# Altium PCB Box.PcbDoc
Units mil, origin at the board's own origin, x right, y up, seen from the top; angles counter-clockwise.
Board outline 12070 x 6465 mil, 2 copper layers (Top Layer, Bottom Layer); 1 components, 0 nets, 28 pads, 0 vias.
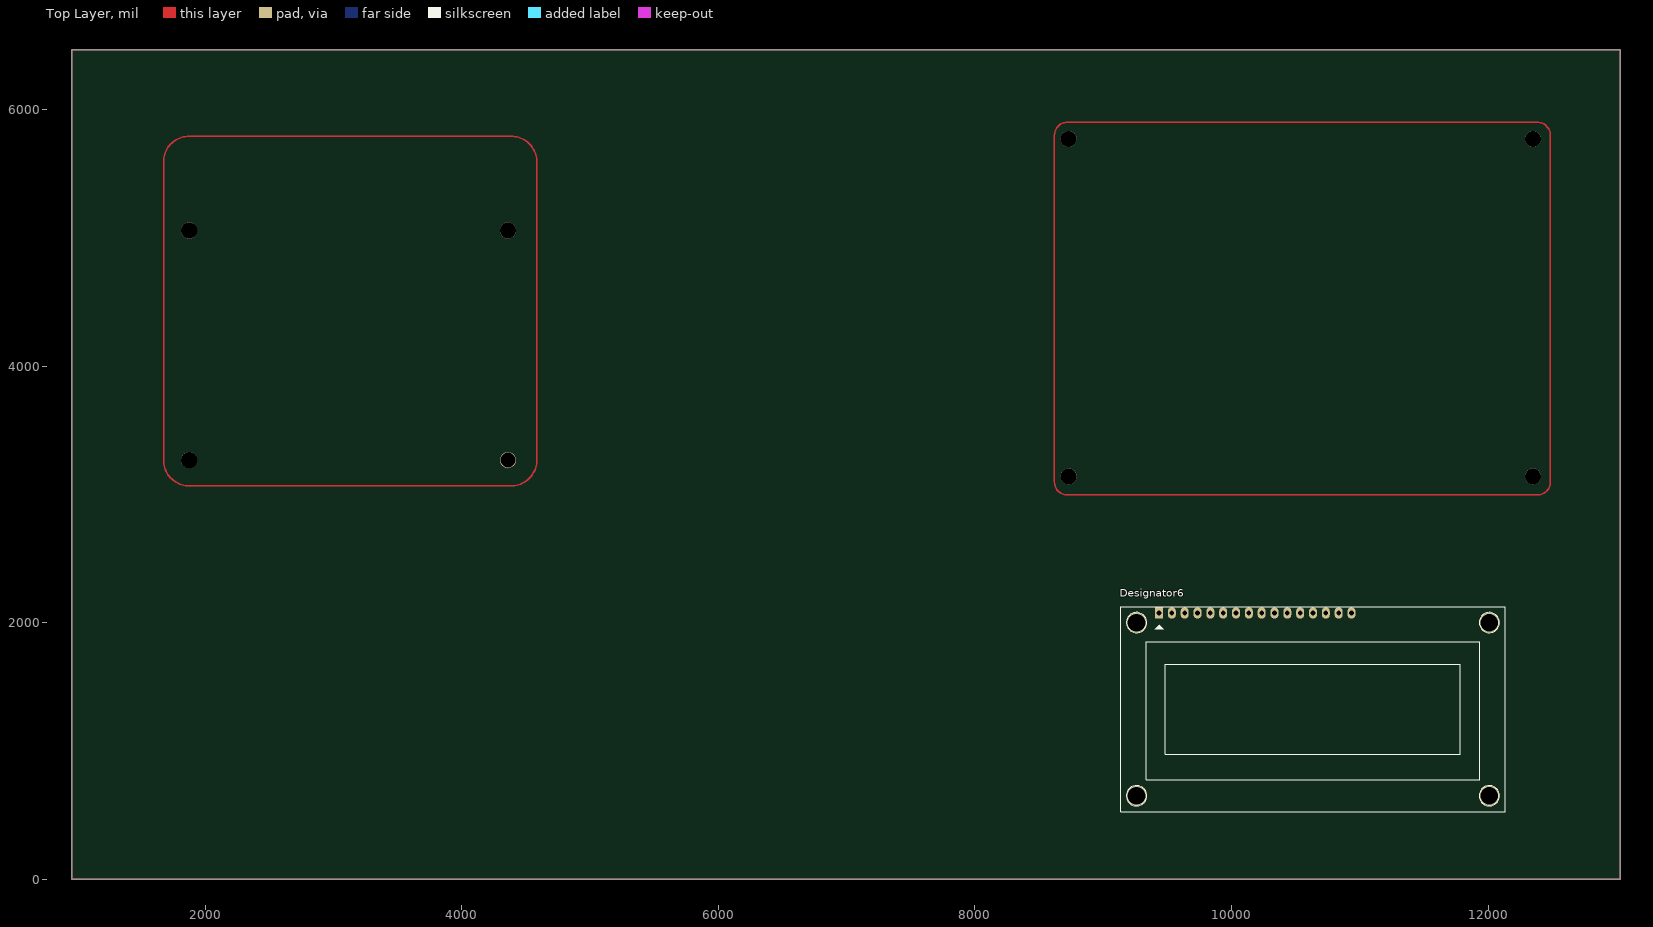
[diagram p0: Top Layer view]
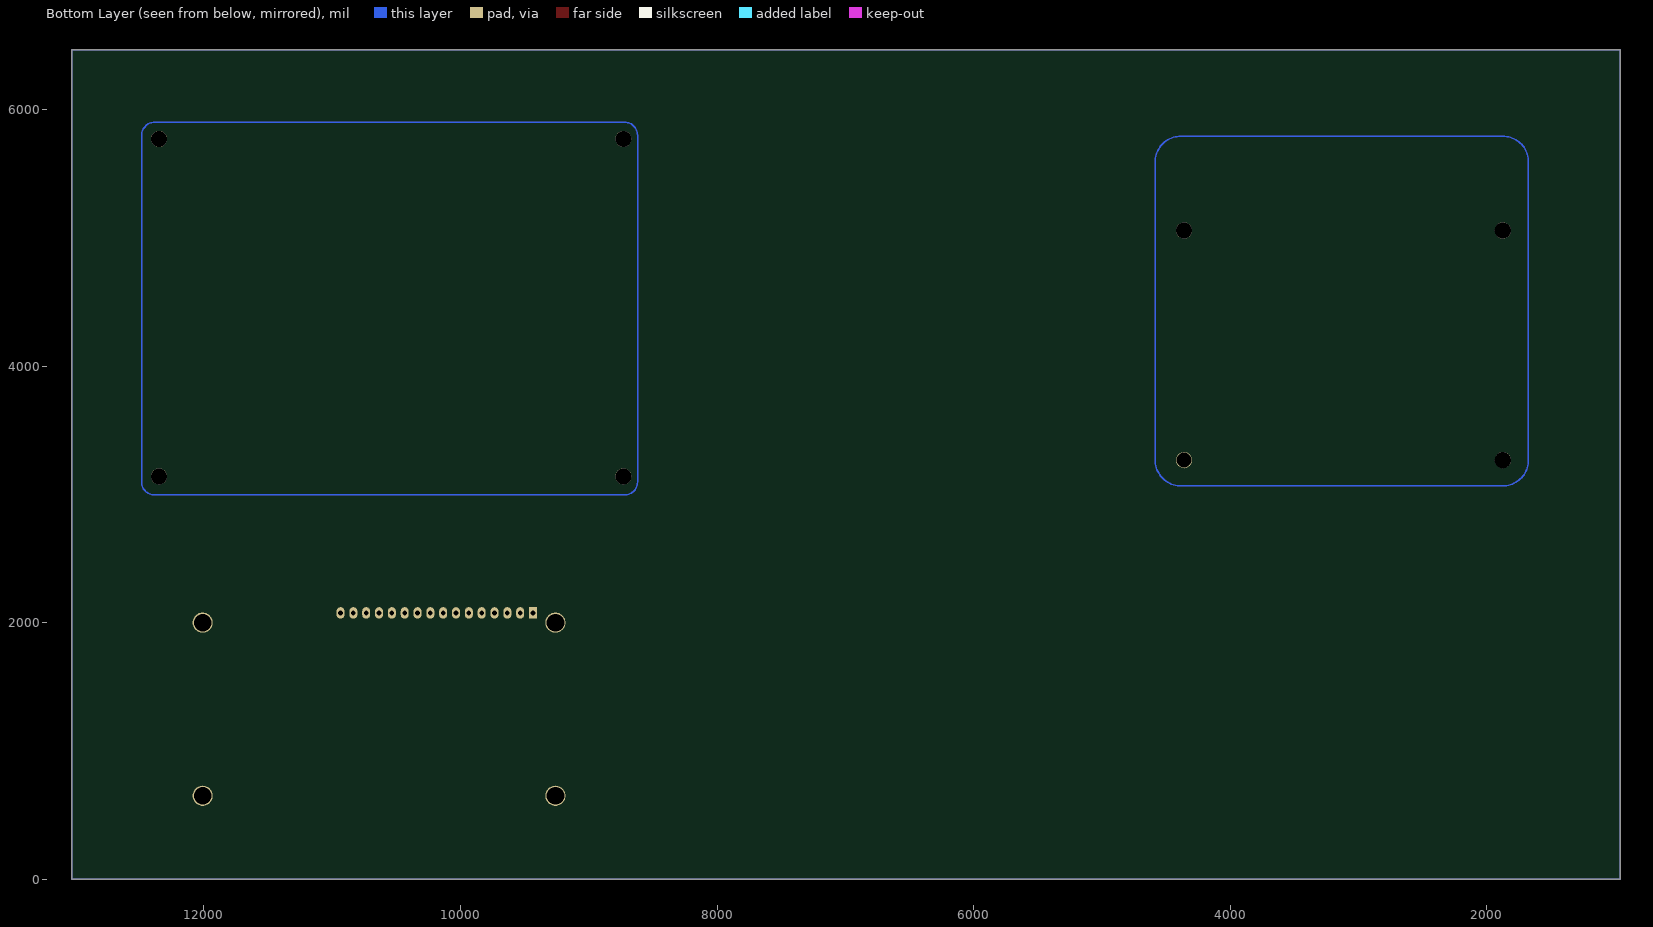
[diagram p1: Bottom Layer view, seen from below]

## Layer stack, top to bottom
Top Solder: solder mask 0.4, Solder Resist, Dk 3.5
Top Layer: signal copper 1.4
Dielectric 1: dielectric 12.6, FR-4, Dk 4.8
Bottom Layer: signal copper 1.4
Bottom Solder: solder mask 0.4, Solder Resist, Dk 3.5

## Board outline
960,0 960,6465 13030,6465 13030,0

## Design rules (kind name [scope] priority, off if disabled: settings)
Clearance [All] p1: gap=10 ignorepadtopadclearanceinfootprint=FALSE except(0: Arc-Hole Track-Hole SMDPad-Hole THPad-Hole Via-Hole Fill-Hole Poly-Hole Region-Hole Text-Hole)
PolygonConnect [All] p1: connectstyle=Relief reliefconductorwidth=10 reliefentries=4 polygonreliefangle="90 Angle" airgapwidth=10
RoutingVias [All] p1: holewidth=28 width=50 viastyle="Through Hole" minholewidth=28 minwidth=50 maxholewidth=28 maxwidth=50
SolderMaskExpansion [All] p1: expansion=4 istentingtop=FALSE
Width [All] p1: maxlimit=10 minlimit=10 preferedwidth=10
30 further rules are at their usual default settings.

## Components (designator, comment, footprint, x,y, rotation, side; value= is the part's Value field where it differs from the comment)
Designator6 "Comment" LCD16X2 9435,2075 r0 top

## Footprints (in the part's own frame and the unit in brackets; to place one, negate y for a bottom-side part, rotate by r counter-clockwise, add the part's x,y. Pads: shape width x height; smd on the part's side, far side on the other; paste and mask are expansions set on the pad)
LCD16X2 [mil] "LCD dipslay 16x2, 16 pin"
  rect 62x90 hole 36: 1(0,0)
  oval 62x90 hole 36: 2(100,0) 3(200,0) 4(300,0) 5(400,0) 6(500,0) 7(600,0) 8(700,0) 9(800,0) 10(900,0) 11(1000,0) 12(1100,0) 13(1200,0) 14(1300,0) 15(1400,0) 16(1500,0)
  round 157.48 hole 137.8: "Hole 0"(-175,-1425) "Hole 0"(-175,-75) "Hole 0"(2575,-1425) "Hole 0"(2575,-75)
  silkscreen extent -300,-1550 2700,50, body extent -315,-1360 2855,77, height 414

## Free pads (board coordinates)
  round 125.98 hole 125.98: 3(1875,3266.07) 3(1875,5056.07) 3(4360,5056.07) 3(8730,3140) 3(8730,5770) 3(12350,3140) 3(12350,5770)
  round 125.98 hole 118.11: 3(4360,3266.07)

## Nets (pads, with @x,y where several pads share a name; then routed paths per layer and width w, separated by ;. In a path a pad name is that pad's centre, name@x,y a point inside that pad or via, vN(x,y) a via of type N, cw(c..) or ccw(c..) an arc to the next point about the centre after c; other vN are vias at no path point)
pads on no net: "Designator6.Hole 0" Designator6.1 Designator6.2 Designator6.3 Designator6.4 Designator6.5 Designator6.6 Designator6.7 Designator6.8 Designator6.9 Designator6.10 Designator6.11 Designator6.12 Designator6.13 Designator6.14 Designator6.15 Designator6.16

## Other copper
Multi-Layer:
  lines w10: 960,0 13030,0 13030,6465 960,6465 960,0 ; 1675,3266.07 ccw(c1875,3266.07) 1875,3066.07 4385,3066.07 ccw(c4385,3266.07) 4585,3266.07 4585,5591.07 ccw(c4385,5591.07) 4385,5791.07 1875,5791.07 ccw(c1875,5591.07) 1675,5591.07 1675,3266.07 ; 8620,3095 ccw(c8720,3095) 8720,2995 12385,2995 ccw(c12385,3095) 12485,3095 12485,5800 ccw(c12385,5800) 12385,5900 8720,5900 ccw(c8720,5800) 8620,5800 8620,3095